# Altium PCB syspcb.PcbDoc
Units mm, origin at the board's own origin, x right, y up, seen from the top; angles counter-clockwise.
Board outline 95.88 x 90.17 mm, 4 copper layers (TOP, GND, VCC, BOT), stack 0.778 mm thick; 51 components, 51 nets, 217 pads, 123 vias.
Unrouted connection lines stored in the file: 41.
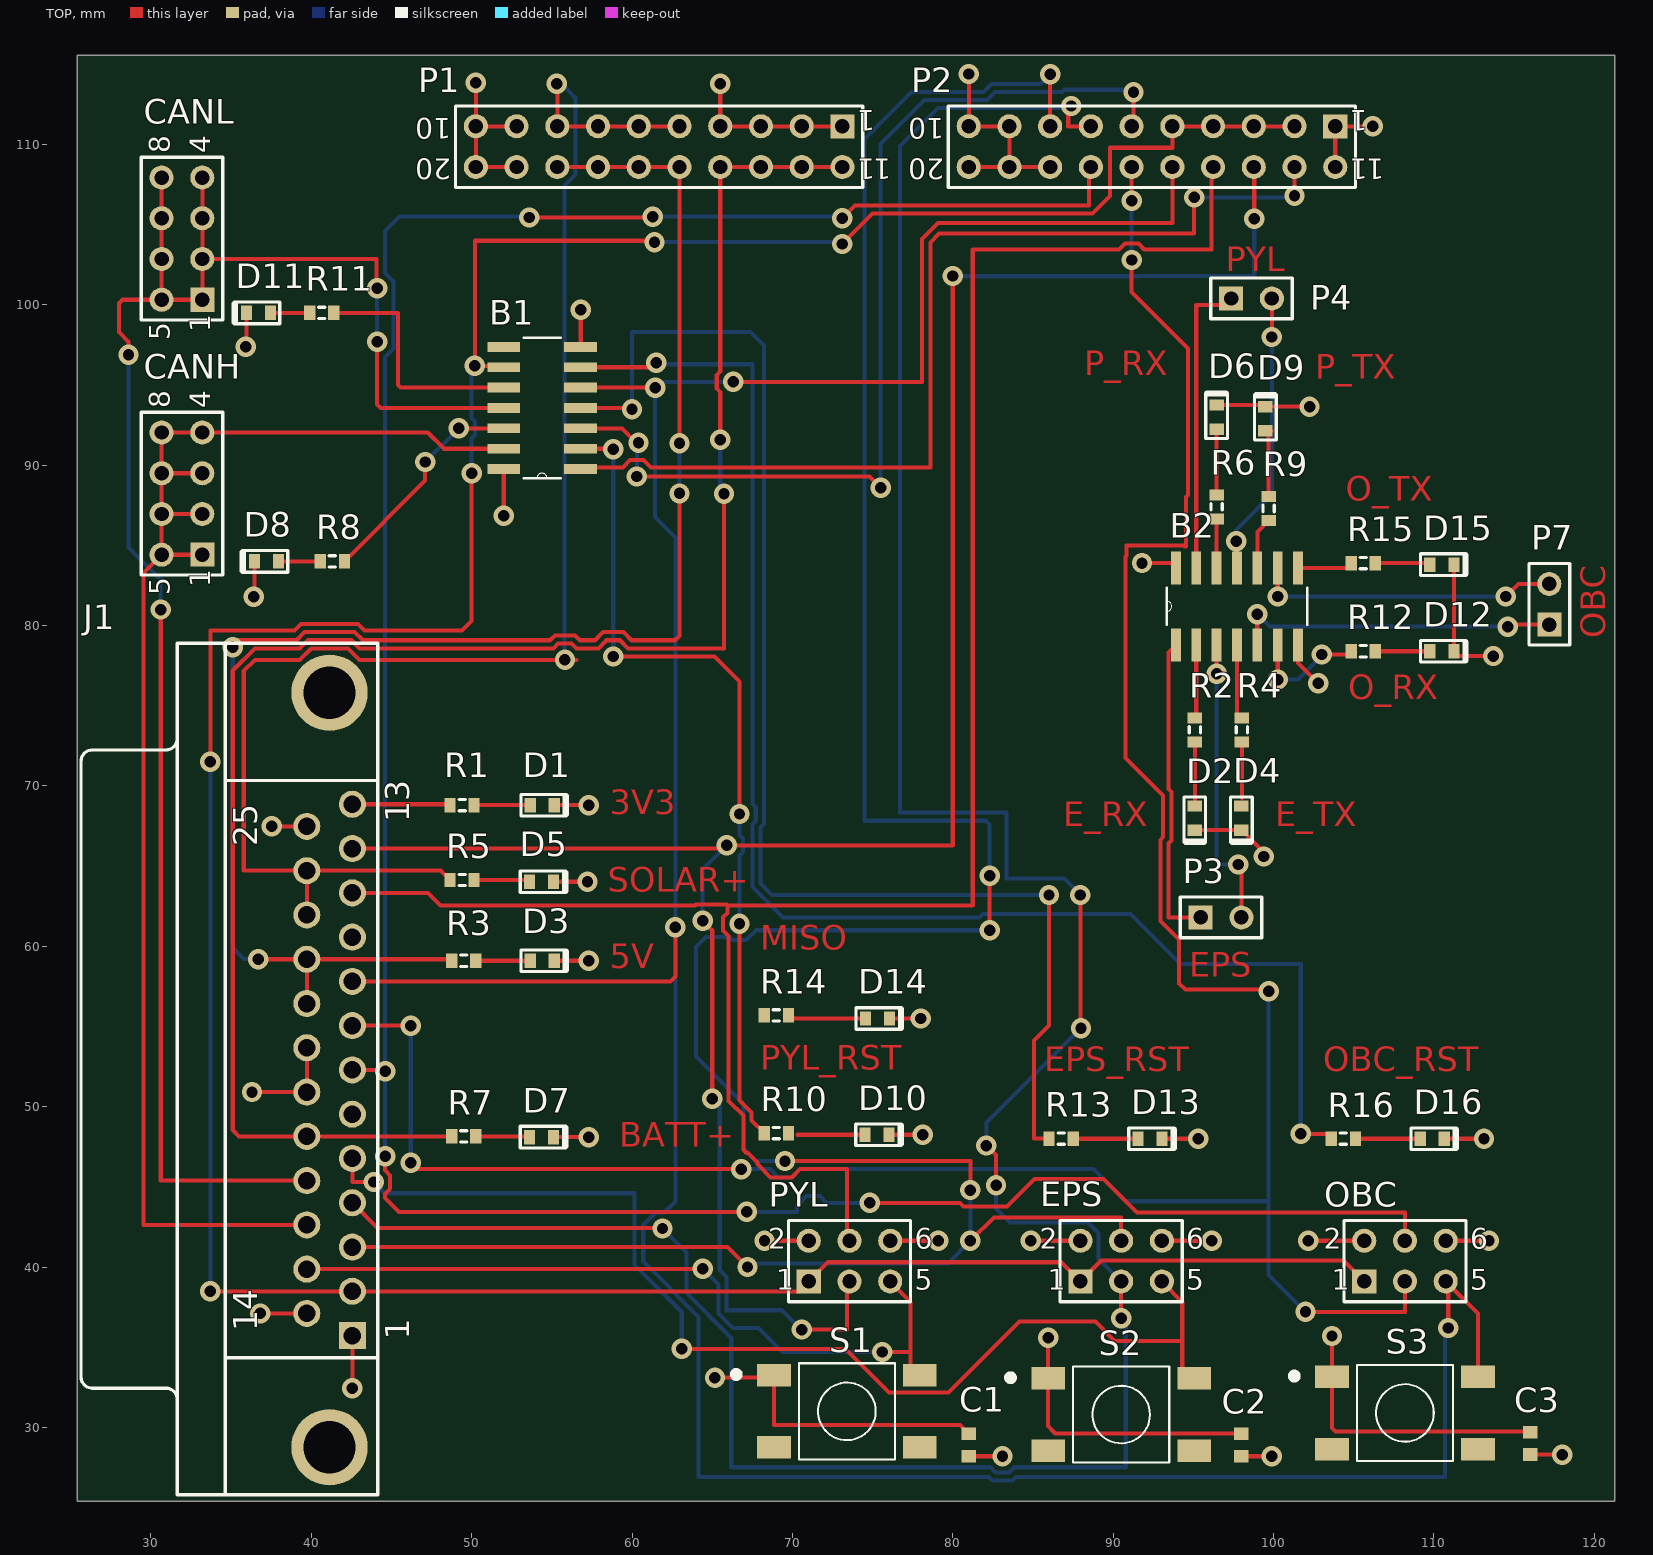
[diagram p0: TOP view]
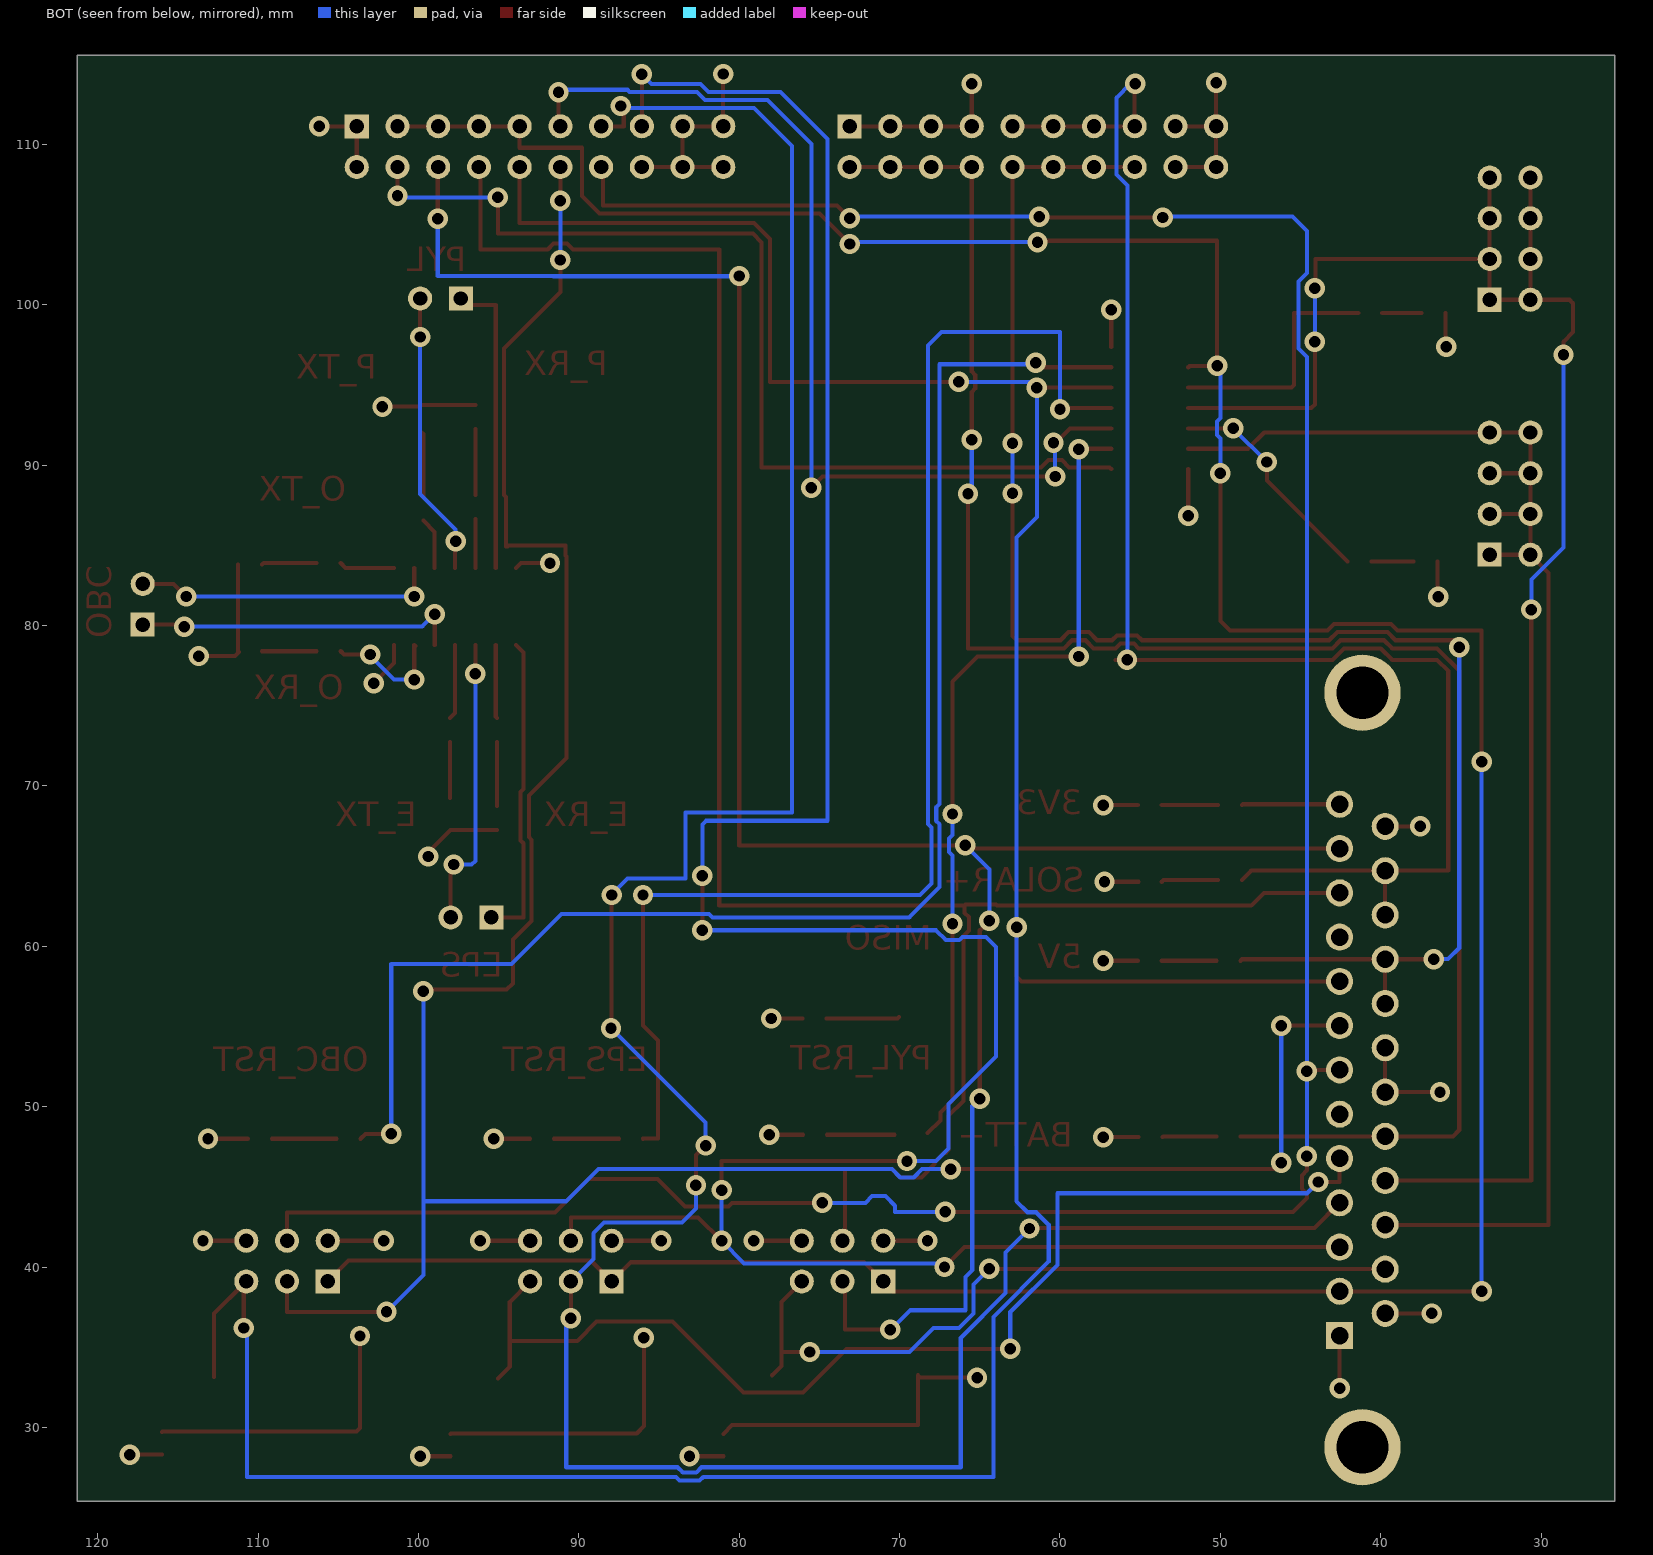
[diagram p1: BOT view, seen from below]
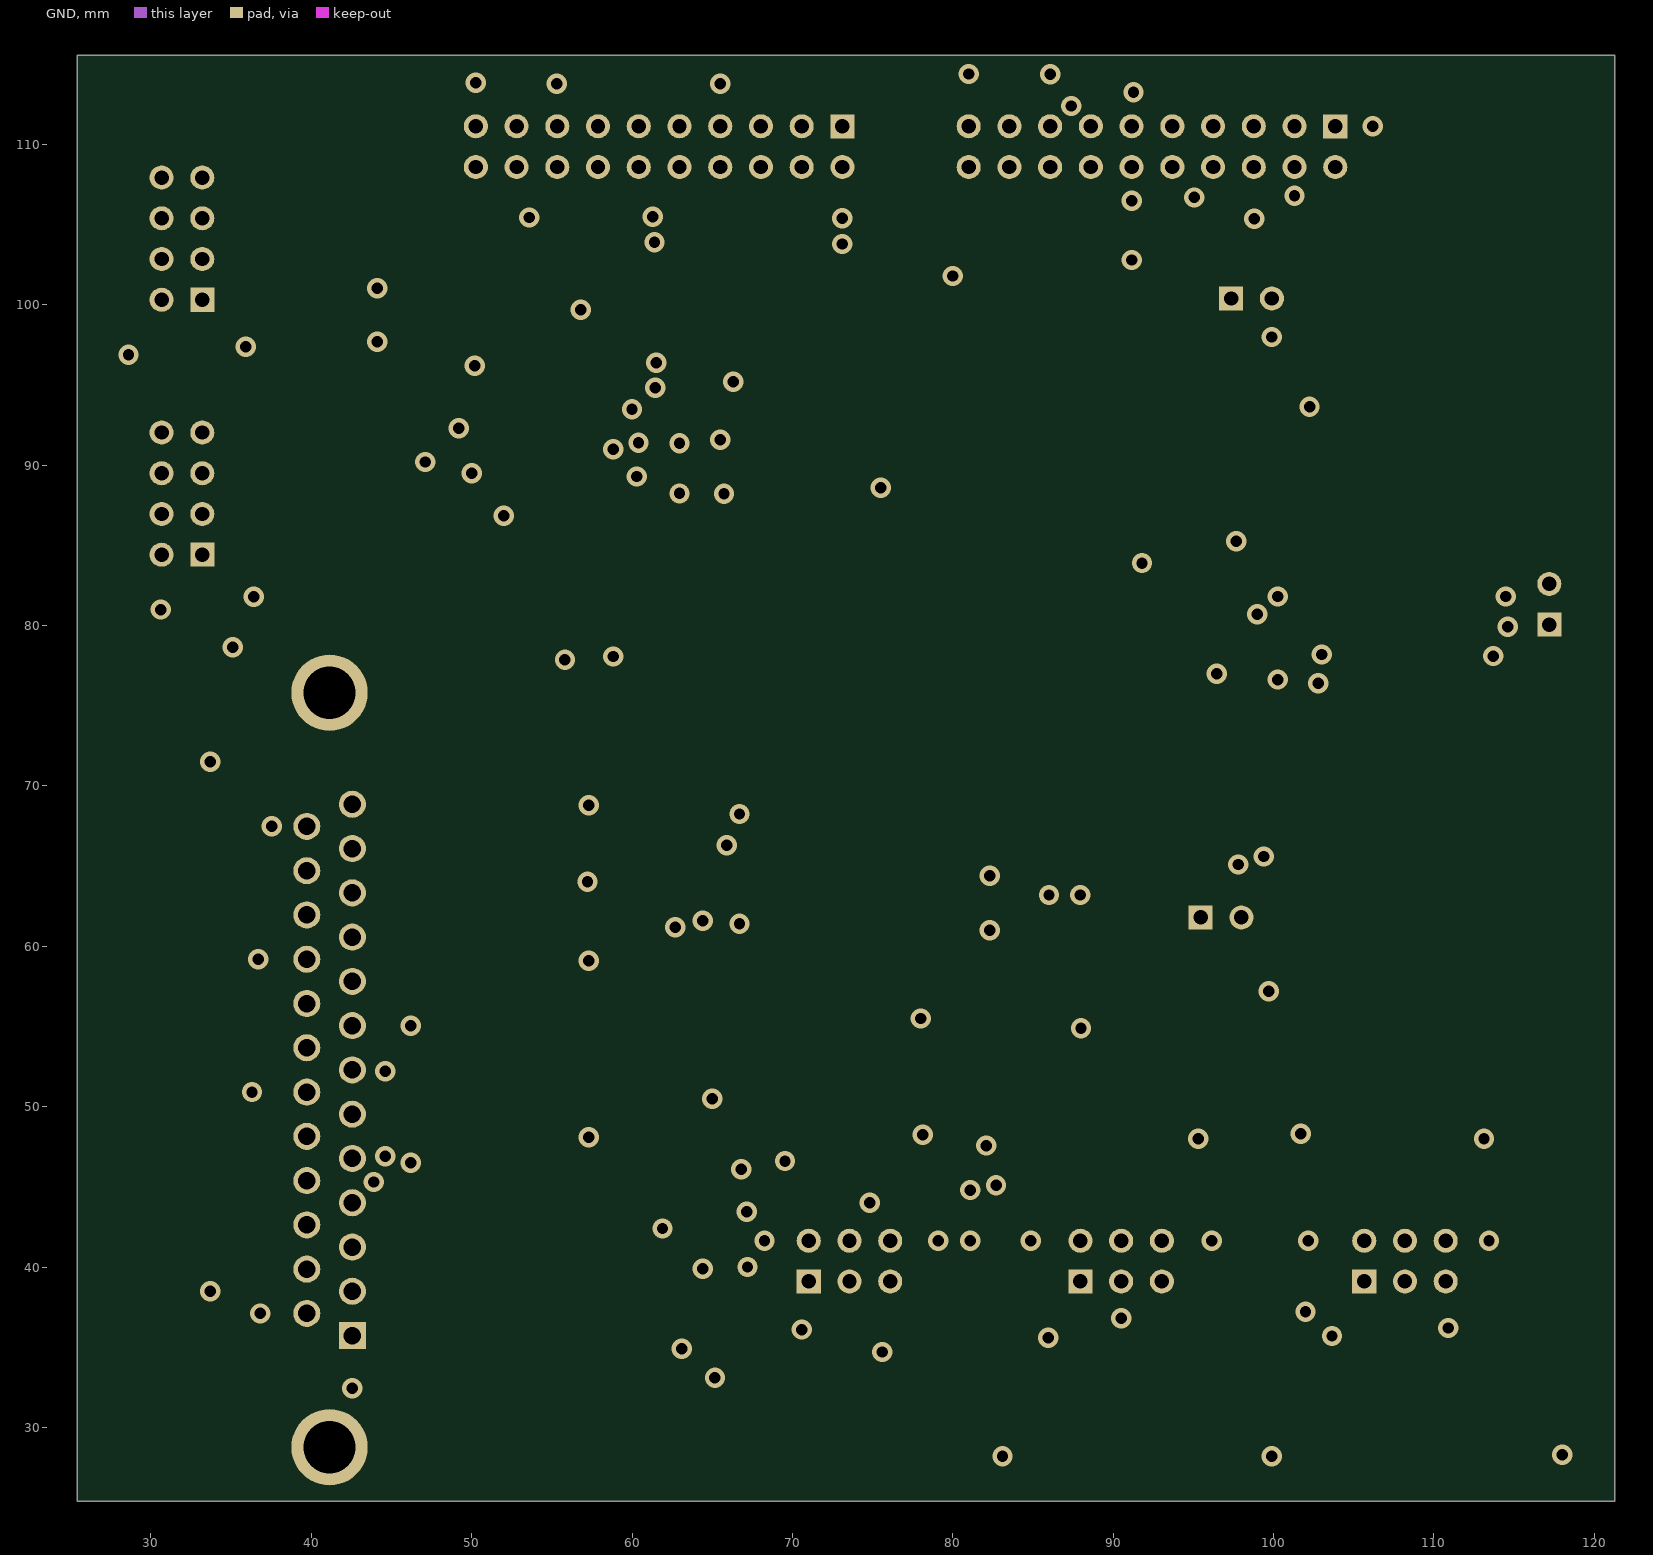
[diagram p2: GND]
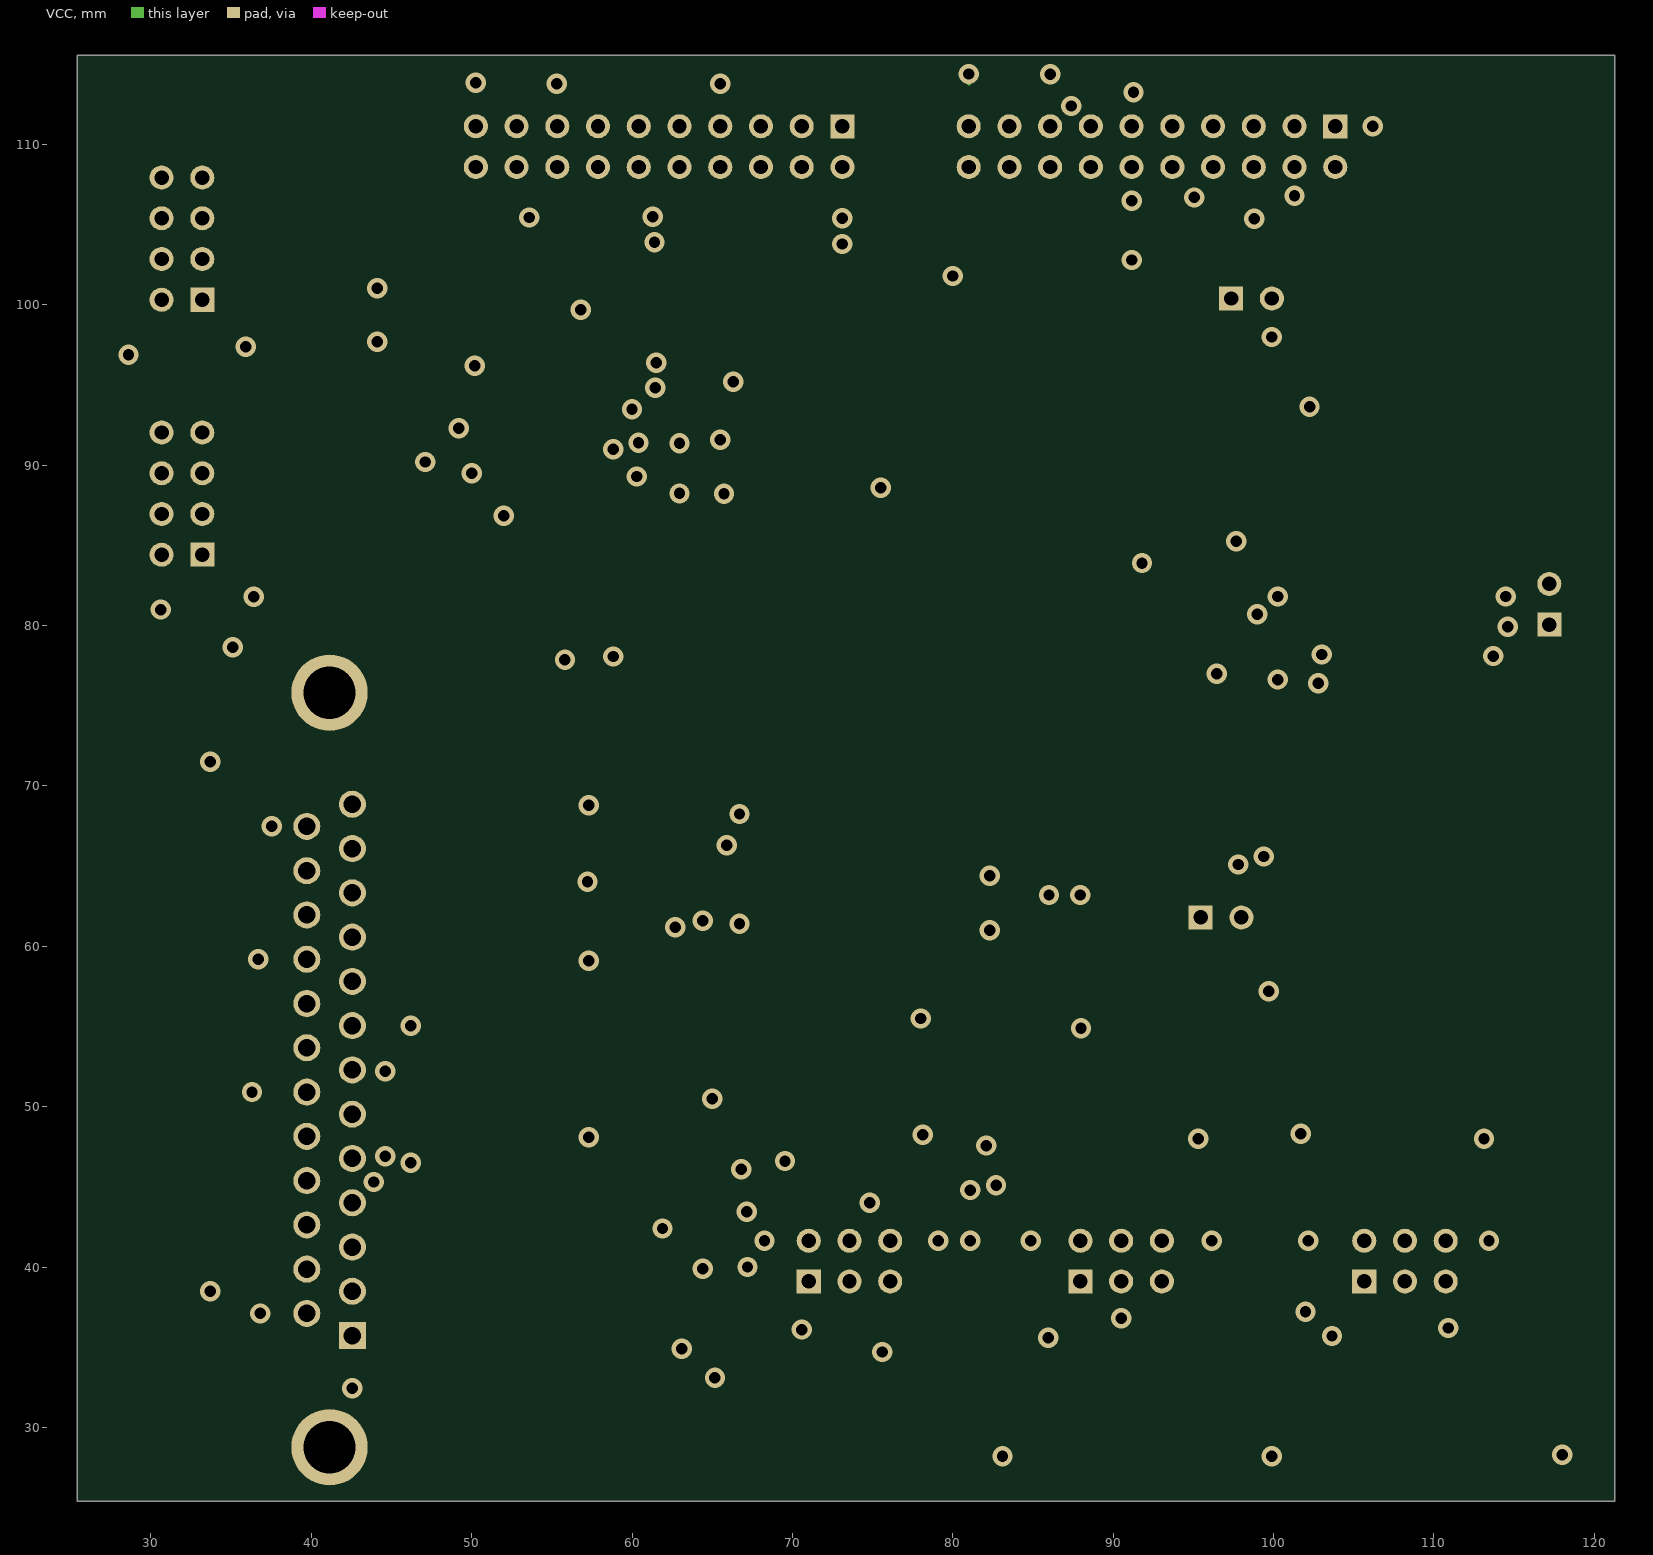
[diagram p3: VCC]

## Layer stack, top to bottom
Top Solder: solder mask 0.0102, Solder Resist, Dk 3.5
TOP: signal copper 0.0356
Dielectric 1: core 0.254, FR-4, Dk 4.2
GND: signal copper 0.036
Dielectric 3: prepreg 0.127, Dk 4.2
VCC: signal copper 0.036
Dielectric 2: core 0.254, Dk 4.2
BOT: signal copper 0.0356
Bottom Solder: solder mask 0.0102, Solder Resist, Dk 3.5

## Board outline
25.4,25.4 121.285,25.4 121.285,115.57 25.4,115.57

## Design rules (kind name [scope] priority, off if disabled: settings)
Clearance [All] p1: gap=0.254 ignorepadtopadclearanceinfootprint=FALSE except(0: Arc-Hole Track-Hole SMDPad-Hole THPad-Hole Via-Hole Fill-Hole Poly-Hole Region-Hole Text-Hole)
PolygonConnect [All] p1: connectstyle=Relief reliefconductorwidth=0.254 reliefentries=4 polygonreliefangle="90 Angle" airgapwidth=0.254
RoomDefinition syspcb [InComponentClass('syspcb')] p1: confinementstyle=ConfineIn formatcopy=TRUE lockcomponents=FALSE outline 0,0 50.8,0 50.8,25.4 0,25.4
RoutingVias [All] p1: holewidth=0.711 width=1.27 viastyle="Through Hole" minholewidth=0.711 minwidth=1.27 maxholewidth=0.711 maxwidth=1.27
SolderMaskExpansion [All] p1: expansion=0.102
Width [All] p1: maxlimit=0.254 minlimit=0.254 preferedwidth=0.254
30 further rules are at their usual default settings.

## Components (designator, comment, footprint, x,y, rotation, side; value= is the part's Value field where it differs from the comment)
B1 "SN74LV07A" SOIC127P600X175-14N 51.999,97.38 r180 top
B2 "SN74LV07A" SOIC127P600X175-14N 101.535,83.594 r90 top
C1 "Cap" 1608[0603] 80.993,28.9 r90 top value=1uF
C2 "Cap" 1608[0603] 98,28.9 r90 top value=1uF
C3 "Cap" 1608[0603] 116,29 r90 top value=1uF
CANH "Header 4X2A" HDR2X4_CEN 33.2,84.42 r90 top
CANL "Header 4X2A" HDR2X4_CEN 33.2,100.32 r90 top
D1 "LED2" 0603-LED 54.4,68.8 r0 top
D2 "LED2" 0603-LED 95.095,67.994 r270 top
D3 "LED2" 0603-LED 54.4,59.1 r0 top
D4 "LED2" 0603-LED 98,67.994 r270 top
D5 "LED2" 0603-LED 54.35,64.025 r0 top
D6 "LED2" 0603-LED 96.455,93 r90 top
D7 "LED2" 0603-LED 54.35,48.1 r0 top
D8 "LED2" 0603-LED 37.2,84 r180 top
D9 "LED2" 0603-LED 99.5,92.9 r90 top
D10 "LED2" 0603-LED 75.275,48.25 r0 top
D11 "LED2" 0603-LED 36.7,99.5 r180 top
D12 "LED2" 0603-LED 110.5,78.4 r0 top
D13 "LED2" 0603-LED 92.296,48 r0 top
D14 "LED2" 0603-LED 75.3,55.5 r0 top
D15 "LED2" 0603-LED 110.5,83.8 r0 top
D16 "LED2" 0603-LED 109.9,48 r0 top
EPS "HDR2X3" HDR2X3 87.96,39.1 r0 top
J1 "D Connector 25" DSUB1.385-2H25A 31.638,52.291 r90 top
OBC "HDR2X3" HDR2X3 105.66,39.1 r0 top
P1 "Header 10X2A" HDR2X10_CEN 73.119,111.137 r180 top
P2 "Header 10X2A" HDR2X10_CEN 103.853,111.137 r180 top
P3 "EPS1" HDR1X2 95.46,61.8 r0 top
P4 "PYL1" HDR1X2 97.36,100.4 r0 top
P7 "OBC1" HDR1X2 117.2,80.06 r90 top
PYL "HDR2X3" HDR2X3 71.02,39.1 r0 top
R1 "Res2" J1-0603 49.4,68.8 r0 top value=330
R2 "Res2" J1-0603 95.095,73.494 r270 top value=330
R3 "Res2" J1-0603 49.5,59.1 r0 top value=330
R4 "Res2" J1-0603 98.035,73.494 r270 top value=330
R5 "Res2" J1-0603 49.4,64.135 r0 top value=330
R6 "Res2" J1-0603 96.455,87.4 r90 top value=330
R7 "Res2" J1-0603 49.5,48.15 r0 top value=330
R8 "Res2" J1-0603 41.311,84 r180 top value=330
R9 "Res2" J1-0603 99.7,87.3 r90 top value=330
R10 "Res2" J1-0603 69,48.35 r0 top value=330
R11 "Res2" J1-0603 40.65,99.5 r180 top value=330
R12 "Res2" J1-0603 105.6,78.4 r0 top value=330
R13 "Res2" J1-0603 86.76,48 r0 top value=330
R14 "Res2" J1-0603 69,55.7 r0 top value=330
R15 "Res2" J1-0603 105.6,83.9 r0 top value=330
R16 "Res2" J1-0603 104.36,48 r0 top value=330
S1 "SW-PB" SW_5-1437565-0 73.4,31 r0 top
S2 "SW-PB" SW_5-1437565-0 90.5,30.8 r0 top
S3 "SW-PB" SW_5-1437565-0 108.2,30.9 r0 top

## Footprints (in the part's own frame and the unit in brackets; to place one, negate y for a bottom-side part, rotate by r counter-clockwise, add the part's x,y. Pads: shape width x height; smd on the part's side, far side on the other; paste and mask are expansions set on the pad)
0603-LED [mm]
  rect 0.7x0.9 smd: 1(-0.75,0) 2(0.75,0)
  silkscreen extent -1.32,-0.67 1.5,0.67, body extent -0.85,-0.48 0.85,0.48, height 0.9
1608[0603] [mm] "Chip Capacitor, Body 1.6x0.8mm, IPC High Density"
  rect 0.8x0.9 smd: 1(-0.7,0) 2(0.7,0)
  body extent -0.87,-0.48 0.87,0.48, height 1.3
DSUB1.385-2H25A [mm] "Connector; D Subminiature; 25 Position; Right Angle; Pitch 1.385 mm"
  rect 1.69x1.69 hole 1.09: 1(-16.566,-10.92)
  round 1.69 hole 1.09: 2(-13.805,-10.92) 3(-11.044,-10.92) 4(-8.283,-10.92) 5(-5.522,-10.92) 6(-2.761,-10.92) 7(0,-10.92) 8(2.761,-10.92) 9(5.522,-10.92) 10(8.283,-10.92) 11(11.044,-10.92) 12(13.805,-10.92) 13(16.566,-10.92) 14(-15.185,-8.08) 15(-12.424,-8.08) 16(-9.663,-8.08) 17(-6.902,-8.08) 18(-4.141,-8.08) 19(-1.38,-8.08) 20(1.381,-8.08) 21(4.142,-8.08) 22(6.903,-8.08) 23(9.664,-8.08) 24(12.425,-8.08) 25(15.186,-8.08)
  round 4.76 hole 3.26: 26(-23.526,-9.5) 27(23.526,-9.5)
  silkscreen extent -26.5,-12.5 26.6,6
HDR1X2 [mm] "Connector; Header; 2 Position"
  rect 1.5x1.5 hole 0.9: 1(0,0)
  round 1.5 hole 0.9: 2(2.54,0)
  silkscreen extent -1.27,-1.27 3.81,1.27
HDR2X3 [mm] "Connector; Header; 3x2 Position"
  rect 1.5x1.5 hole 0.9: 1(0,0)
  round 1.5 hole 0.9: 2(0,2.54) 3(2.54,0) 4(2.54,2.54) 5(5.08,0) 6(5.08,2.54)
  silkscreen extent -1.27,-1.27 6.35,3.81
HDR2X4_CEN [mm] "Connector; Header; 4x2 Position"
  rect 1.5x1.5 hole 0.9: 1(0,0)
  round 1.5 hole 0.9: 2(2.54,0) 3(5.08,0) 4(7.62,0) 5(0,2.54) 6(2.54,2.54) 7(5.08,2.54) 8(7.62,2.54)
  silkscreen extent -1.27,-1.27 8.89,3.81
HDR2X10_CEN [mm] "Connector; Header; 10x2 Position"
  rect 1.5x1.5 hole 0.9: 1(0,0)
  round 1.5 hole 0.9: 2(2.54,0) 3(5.08,0) 4(7.62,0) 5(10.16,0) 6(12.7,0) 7(15.24,0) 8(17.78,0) 9(20.32,0) 10(22.86,0) 11(0,2.54) 12(2.54,2.54) 13(5.08,2.54) 14(7.62,2.54) 15(10.16,2.54) 16(12.7,2.54) 17(15.24,2.54) 18(17.78,2.54) 19(20.32,2.54) 20(22.86,2.54)
  silkscreen extent -1.27,-1.27 24.13,3.81
J1-0603 [mm] "Chip Resistor, Body 1.6x0.8mm, IPC High Density"
  rect 0.7x0.9 smd: 1(-0.75,0) 2(0.75,0)
  silkscreen extent -0.2,-0.35 0.2,0.35, body extent -0.85,-0.48 0.85,0.48, height 0.9
SOIC127P600X175-14N [mil]
  rect 81x24 smd: 1(-189,300) 2(-189,250) 3(-189,200) 4(-189,150) 5(-189,100) 6(-189,50) 7(-189,0) 8(0,0) 9(0,50) 10(0,100) 11(0,150) 12(0,200) 13(0,250) 14(0,300)
  silkscreen extent -140,-22 -49,322
SW_5-1437565-0 [mm]
  rect 2.1x1.4 smd: 1(-4.55,2.25) 2(4.55,2.25) 3(-4.55,-2.25) 4(4.55,-2.25)
  silkscreen extent -7.1,-3 3,3

## Part data
C1 C2 C3: "Capacitor", LatestRevisionDate=17-Jul-2002, LatestRevisionNote="Re-released for DXP Platform.", PackageDescription="Radial Cap, Thru-Hole; 2 Leads; 0.3 in Pin Spacing", PackageReference=RAD-0.3, Published=8-Jun-2000, Publisher="Altium Limited"
CANH CANL: "Header, 4-Pin, Dual row", LatestRevisionDate=17-Jul-2002, LatestRevisionNote="Re-released for DXP Platform.", Publisher="Altium Limited"
D1 D2 D3 D4 D5 D6 D7 D8 D9 D10 D11 D12 D13 D14 D15 D16: "Typical RED, GREEN, YELLOW, AMBER GaAs LED", LatestRevisionDate=17-Jul-2002, LatestRevisionNote="Re-released for DXP Platform.", PackageDescription="SM LED; 2 Flat Leads", PackageReference=3.2X1.6X1.1, PackageVersion=Feb-2002, Published=8-Jun-2000, Publisher="Altium Limited"
EPS OBC PYL: library part MHDR2X3, "Header, 3-Pin, Dual row", LatestRevisionDate=17-Jul-2002, LatestRevisionNote="Re-released for DXP Platform.", Publisher="Altium Limited"
J1: "Receptacle Assembly, 25 Position, Right Angle", PackageDocument=U, DatasheetDocument=19-Mar-1999, Gender=Receptacle, LatestRevisionDate=17-Jul-2002, LatestRevisionNote="Re-released for DXP Platform.", Orientation="Right Angle", PackageReference=787202, Positions=25, Published=15-Jun-2001, Publisher="Altium Limited"
P1 P2: "Header, 10-Pin, Dual row", LatestRevisionDate=17-Jul-2002, LatestRevisionNote="Re-released for DXP Platform.", Publisher="Altium Limited"
P3 P4 P7: library part "Header 2", "Header, 2-Pin", LatestRevisionDate=17-Jul-2002, LatestRevisionNote="Re-released for DXP Platform.", Publisher="Altium Limited"
R1 R2 R3 R4 R5 R6 R7 R8 R9 R10 R11 R12 R13 R14 R15 R16: "Resistor", LatestRevisionDate=17-Jul-2002, LatestRevisionNote="Re-released for DXP Platform.", PackageDescription="Axial Device, Thru-Hole; 2 Leads; 0.4 in Pin Spacing", PackageReference=AXIAL-0.4, Published=8-Jun-2000, Publisher="Altium Limited"
S1 S2 S3: "Switch", LatestRevisionDate=17-Jul-2002, LatestRevisionNote="Re-released for DXP Platform.", PackageDescription="Switch; 2 Leads", PackageReference=SPST-2, Published=24-Mar-1999, Publisher="Altium Limited"

## Via types
v1: diameter 1.27, hole 0.711, TOP to BOT, 123 vias

## Nets (pads, with @x,y where several pads share a name; then routed paths per layer and width w, separated by ;. In a path a pad name is that pad's centre, name@x,y a point inside that pad or via, vN(x,y) a via of type N, cw(c..) or ccw(c..) an arc to the next point about the centre after c; other vN are vias at no path point)
3V3: B1.14 B2.14 C1.2 C2.2 C3.2 EPS.2 J1.13 J1.14 OBC.2 P1.1 P1.2 P1.3 P1.4 P2.9 P2.10 P2.18 P2.19 P2.20 PYL.2 R1.1 S1.1 S2.1 S3.1 | length 103.6
  TOP w0.254: v1(36.806,37.106) J1.14 ; J1.13 48.593,68.857 R1.1 ; v1(51.999,86.851) B1.14 ; v1(65.17,33.1) 68.7,33.1 S1.1 68.85,30.15 80.443,30.15 C1.2 ; v1(65.499,113.793) P1.4 P1.3 P1.2 P1.1 ; v1(68.26,41.64) PYL.2 ; P2.20 P2.19 ; v1(81,114.4) 81,111.144 P2.10 P2.9 P2.19 ; v1(84.86,41.64) EPS.2 ; v1(85.95,35.6) S2.1 85.95,30.073 86.392,29.631 97.969,29.631 C2.2 ; P2.18 P2.19 ; v1(91.8,83.9) 93.609,83.9 B2.14 ; v1(102.16,41.64) OBC.2 ; v1(103.65,35.7) S3.1 103.65,29.95 103.869,29.731 115.969,29.731 C3.2
  VCC w0.254: v1@36.8,37.1 v1(36.806,37.106) ; v1(51.999,86.851) v1@52.3,86.55 ; v1@81,113.8 v1(81,114.4) ; v1@84.8,41.7 v1(84.86,41.64) ; v1@102.1,41.7 v1(102.16,41.64)
5V: J1.21 J1.22 P1.15 P1.16 P1.17 P1.18 R3.1 | length 102.1
  TOP w0.254: v1(35.1,78.639) 34.844,78.895 35.035,79.086 39.066,79.086 39.574,79.594 42.702,79.594 43.21,79.086 54.887,79.086 55.184,79.384 56.447,79.384 56.744,79.086 57.69,79.086 58.198,79.594 59.461,79.594 59.969,79.086 62.686,79.086 62.959,79.359 v1(62.959,88.241) ; v1(36.7,59.194) J1.22 ; J1.21 J1.22 ; R3.1 48.656,59.194 J1.22 ; P1.18 P1.17 P1.16 P1.15 v1(62.959,91.367)
  BOT w0.254: v1(35.1,78.639) 35.1,59.9 35.8,59.2 36.694,59.2 v1(36.7,59.194) ; v1(62.959,88.241) v1(62.959,91.367)
B_CANH: B1.12 R8.1 | length 14.1
  TOP w0.254: R8.1 47.1,89.039 v1(47.1,90.2) ; v1(49.2,92.3) B1.12
  BOT w0.254: v1(47.1,90.2) v1(49.2,92.3)
B_CANL: B1.10 R11.1 | length 15.2
  TOP w0.254: R11.1 45.4,99.5 45.4,95 45.56,94.84 B1.10
B_E_RST: B1.4 R13.1 | length 85.1
  TOP w0.254: B1.4 59.93,93.57 v1(60,93.5) ; v1(86,63.2) 86,55.07 85.065,54.135 85.065,48.01 86,48.01 R13.1
  BOT w0.254: v1(60,93.5) 60,98.3 67.4,98.3 68.224,97.476 68.224,67.619 68.008,67.403 68.008,63.91 68.718,63.2 v1(86,63.2)
B_MISO: B1.8 R14.1
B_O_RST: B1.6 R16.1 | length 92.7
  TOP w0.254: B1.6 61.39,96.11 61.5,96.22 v1(61.5,96.4) ; v1(101.7,48.3) 103.31,48.3 R16.1
  BOT w0.254: v1(61.5,96.4) 61.6,96.3 67.5,96.3 67.5,68.887 67.716,68.671 67.716,67.829 67.5,67.613 67.5,63.7 69.4,61.8 81.663,61.8 81.879,62.016 91.084,62.016 94.2,58.9 101.7,58.9 v1(101.7,48.3)
B_P_RST: B1.2 R10.1 | length 52.5
  TOP w0.254: B1.2 58.8,91.03 v1(58.83,91) ; v1(58.83,78.07) 65.13,78.07 66.7,76.5 v1(66.7,68.25) ; v1(66.7,61.4) 66.7,50.398 67.453,49.646 67.453,49.147 R10.1
  BOT w0.254: v1(58.83,78.07) v1(58.83,91) ; v1(66.7,61.4) 66.7,65.663 66.916,65.879 66.916,66.721 66.7,66.937 v1(66.7,68.25)
B_RX1: B2.2 R2.1 | length 4.6
  TOP w0.254: R2.1 95.185,74.334 B2.2
B_RX2: B2.12 R6.1 | length 3.1
  TOP w0.254: B2.12 R6.1
B_RX3: B2.6 R12.1 | length 7.6
  TOP w0.254: B2.6@100.2,78.729 B2.6 v1(100.265,76.635) ; v1(103,78.2) 104.65,78.2 R12.1
  BOT w0.254: v1(100.265,76.635) 101.535,76.635 103,78.1 v1(103,78.2)
B_TX1: B2.4 R4.1 | length 4.7
  TOP w0.254: B2.4 97.725,74.554 R4.1
B_TX2: B2.10 R9.1 | length 3.2
  TOP w0.254: B2.10 98.995,85.845 R9.1
B_TX3: B2.8 R15.1 | length 3.4
  TOP w0.254: B2.8 104.544,83.594 R15.1
BATT+: J1.18 P1.11 P1.12 P1.13 P1.14 R7.1 | length 112.7
  TOP w0.254: R7.1 J1.18 35.5,48.15 35.1,48.55 35.1,77.202 36.476,78.578 39.276,78.578 39.784,79.086 42.492,79.086 43,78.578 55.097,78.578 55.395,78.876 56.236,78.876 56.534,78.578 57.901,78.578 58.409,79.086 59.25,79.086 59.758,78.578 65.733,78.578 v1(65.733,88.233) ; v1(65.499,91.601) 65.499,94.564 65.284,94.779 65.284,95.621 65.499,95.836 P1.14 P1.13 P1.12 P1.11
  BOT w0.254: v1(65.499,91.601) 65.499,88.467 v1(65.733,88.233)
CANH: B1.13 CANH.1 CANH.2 CANH.3 CANH.4 CANH.5 CANH.6 CANH.7 CANH.8 J1.16 | length 89.4
  TOP w0.254: CANH.1 CANH.5 ; CANH.2 CANH.6 ; CANH.3 CANH.7 ; J1.16 29.528,42.628 29.528,83.288 CANH.5 ; B1.13 48.27,91.03 47.26,92.04 CANH.4 CANH.8 CANH.7 ; CANH.5 CANH.6 ; CANH.6 CANH.7
CANL: B1.11 CANL.1 CANL.2 CANL.3 CANL.4 CANL.5 CANL.6 CANL.7 CANL.8 J1.17 | length 113.4
  TOP w0.254: v1(28.6,96.9) 28.6,97.7 28,98.3 28,100.1 28.22,100.32 CANL.5 ; v1(30.6,81) 30.611,80.989 30.611,45.389 J1.17 ; CANL.8 CANL.7 CANL.6 CANL.5 ; CANL.4 CANL.3 CANL.2 ; v1(44.1,97.7) 44.1,93.8 44.33,93.57 B1.11 ; v1(44.1,101.041) 44.06,101.081 44.06,102.86 CANL.2 ; CANL.5 CANL.1 CANL.2
  BOT w0.254: v1(28.6,96.9) 28.6,84.881 30.6,82.881 v1(30.6,81) ; v1(44.1,97.7) v1(44.1,101.041)
E_MOSI: EPS.4 J1.3 P2.8 | length 176.9
  TOP w0.254: J1.3 65.953,41.247 v1(67.2,40) ; v1(69.539,46.608) 81.1,46.608 v1(81.1,44.8) ; v1(81.1,41.64) 82.56,43.1 90.5,43.1 EPS.4 ; v1(82.3,61) v1(82.3,64.4) ; P2.8 v1(86.073,114.373)
  BOT w0.254: v1(67.2,40) 67.431,40.231 79.691,40.231 v1(81.1,41.64) v1(81.1,44.8) ; v1(69.539,46.608) 67.729,46.608 66.945,47.392 66.945,50.164 63.984,53.125 63.984,59.959 64.609,60.584 66.079,60.584 66.279,60.384 67.121,60.384 67.737,61 v1(82.3,61) ; v1(82.3,64.4) 82.3,67.6 82.071,67.829 74.484,67.829 74.484,110.343 77.426,113.285 81.922,113.285 82.415,113.779 85.479,113.779 v1(86.073,114.373)
E_RST: B1.3 EPS.5 J1.5 P2.6 S2.2 | length 134.2
  TOP w0.254: J1.5 42.558,45.3 v1(43.9,45.3) ; B1.3 59.367,92.3 60.267,91.4 v1(60.4,91.4) ; v1(60.3,89.3) 74.8,89.3 v1(75.5,88.6) ; v1(63.1,34.9) 73.3,34.9 76.031,32.169 79.727,32.169 84.174,36.616 86.371,36.616 86.387,36.6 88.9,36.6 90.1,35.4 94.31,35.4 ; P2.6 91.271,111.255 v1(91.271,113.271) ; EPS.5 94.31,37.83 94.31,35.4 ; S2.2 94.31,33.79 94.31,35.4
  BOT w0.254: v1(43.9,45.3) 44.6,44.6 60.163,44.6 60.163,40.123 63.1,37.186 v1(63.1,34.9) ; v1(60.3,89.3) v1@60.3,91.367 ; v1(75.5,88.6) 75.5,110.037 78.24,112.777 82.132,112.777 82.626,113.271 86.834,113.271 86.979,113.416 91.125,113.416 v1(91.271,113.271)
E_SCK: EPS.3 J1.4 P2.7 | length 178.1
  TOP w0.254: J1.4 44.139,42.428 61.872,42.428 v1(61.9,42.4) ; v1(82.1,47.575) 82.7,46.975 v1(82.7,45.1) ; v1(87.4,112.4) 87.204,112.204 87.204,111.137 P2.7 ; v1(87.96,63.2) 87.96,54.865 87.995,54.9 v1(88,54.9) ; v1(90.5,36.8) EPS.3
  BOT w0.254: v1(61.9,42.4) 63.384,40.916 63.384,38.385 66.186,35.583 66.186,27.514 82.349,27.514 82.679,27.184 83.521,27.184 83.851,27.514 90.786,27.514 90.786,36.514 v1(90.5,36.8) ; v1@82.1,47.57 v1(82.1,47.575) 82.1,49 v1(88,54.9) ; v1(82.7,45.1) 82.7,43.651 83.58,42.771 88.428,42.771 89.091,42.108 89.091,40.509 EPS.3 ; v1(87.4,112.4) 87.269,112.269 79.069,112.269 76.7,109.9 76.7,68.337 83.363,68.337 83.363,64.237 86.963,64.237 88,63.2 v1(87.96,63.2)
GND: B1.7 B2.7 C1.1 C2.1 C3.1 D1.2 D2.2 D3.2 D4.2 D5.2 D6.2 D7.2 D8.2 D9.2 D10.2 D11.2 D12.2 D13.2 D14.2 D15.2 D16.2 EPS.6 J1.1 J1.19 J1.20 J1.25 OBC.6 P1.9 P1.10 P1.19 P1.20 P2.1 P2.11 PYL.6 | length 86.5
  TOP w0.254: v1(35.9,97.4) 35.95,97.45 D11.2 ; v1(36.3,50.911) J1.19 J1.20 ; v1(36.4,81.8) 36.45,81.85 D8.2 ; v1(37.523,67.477) J1.25 ; v1(42.558,32.442) J1.1 ; P1.20 P1.10 ; v1(50.259,113.859) P1.10 ; P1.9 P1.10 ; D7.2 v1(57.3,48.1) ; D5.2 v1(57.225,64.025) ; D3.2 v1(57.3,59.1) ; D1.2 v1(57.3,68.8) ; B1.7 v1(56.8,99.7) ; D10.2 v1(78.125,48.25) ; D14.2 v1(78,55.5) ; PYL.6 v1(79.1,41.64) ; C1.1 v1(83.1,28.2) ; EPS.6 v1(96.14,41.64) ; D13.2 v1(95.3,48) ; D2.2 D4.2 99.4,65.844 v1(99.4,65.6) ; D6.2 99.8,93.75 99.9,93.65 v1(102.25,93.65) ; C2.1 v1(99.9,28.2) ; B2.7 101.535,77.665 v1(102.8,76.4) ; P2.11 P2.1 v1(106.2,111.137) ; D16.2 v1(113.13,48) ; OBC.6 v1(113.44,41.64) ; D15.2 D12.2 111.2,78.35 111.45,78.1 v1(113.7,78.1) ; C3.1 v1(118,28.3)
  GND w0.254: v1@37.5,67.5 v1(37.523,67.477) ; v1(42.558,32.442) v1@42.6,32.4 ; v1(50.259,113.859) v1@50.3,113.9 ; v1(57.225,64.025) v1@57.4,64.2 ; v1(57.3,68.8) v1@57.5,69 ; v1(78.125,48.25) v1@78.275,48.4 ; v1(96.14,41.64) v1@96.2,41.7 ; v1(102.25,93.65) v1@102.3,93.6 ; v1(113.13,48) v1@113.23,48.1 ; v1(113.44,41.64) v1@113.5,41.7
MISO: B1.9 EPS.1 J1.2 OBC.1 P2.2 P2.3 P2.4 P2.5 PYL.1 | length 215.1
  TOP w0.254: v1(33.7,38.5) 33.7,38.486 J1.2 70.406,38.486 PYL.1 72.22,40.3 86.76,40.3 EPS.1 89.26,40.4 104.36,40.4 OBC.1 ; v1(33.7,71.5) 33.7,79.692 38.953,79.692 39.363,80.102 42.913,80.102 43.323,79.692 49.392,79.692 50,80.3 v1(50,89.5) ; B1.9 51.909,96.2 v1(50.2,96.2) 50.2,104 61.3,104 v1(61.4,103.9) ; v1(73.1,103.8) 74.992,105.692 88.71,105.692 89.8,106.782 89.8,109.8 93.7,109.8 93.7,111.13 P2.5 P2.4 P2.3 P2.2
  BOT w0.254: v1(33.7,38.5) v1(33.7,71.5) ; v1(50,89.5) 50,91.663 50.216,91.879 50.216,92.721 50,92.937 50,96 v1(50.2,96.2) ; v1(61.4,103.9) 61.39,103.91 73.109,103.91 73.1,103.9 v1(73.1,103.8)
NetD1_1: D1.1 R1.2 | length 3.5
  TOP w0.254: R1.2 D1.1
NetD2_1: D2.1 R2.2 | length 4
  TOP w0.254: D2.1 R2.2
NetD3_1: D3.1 R3.2 | length 3.4
  TOP w0.254: R3.2 D3.1
NetD4_1: D4.1 R4.2 | length 3.5
  TOP w0.254: 98.035,69.259 R4.2
NetD5_1: D5.1 R5.2 | length 3.5
  TOP w0.254: R5.2 53.54,64.135 D5.1@53.65,64.025
NetD6_1: D6.1 R6.2 | length 4.1
  TOP w0.254: R6.2 D6.1
NetD7_1: D7.1 R7.2 | length 3.4
  TOP w0.254: R7.2 53.55,48.15 D7.1
NetD8_1: D8.1 R8.2 | length 2.6
  TOP w0.254: D8.1 R8.2
NetD9_1: D9.1 R9.2 | length 4.2
  TOP w0.254: R9.2 99.7,91.95 D9.1@99.9,92.15
NetD10_1: D10.1 R10.2 | length 4.2
  TOP w0.254: 70.325,48.25 D10.1
NetD11_1: D11.1 R11.2 | length 2.5
  TOP w0.254: D11.1 R11.2
NetD12_1: D12.1 R12.2 | length 3.4
  TOP w0.254: R12.2 D12.1
NetD13_1: D13.1 R13.2 | length 4
  TOP w0.254: R13.2 D13.1
NetD14_1: D14.1 R14.2 | length 4.6
  TOP w0.254: R14.2@70.025,55.6 70.125,55.5 D14.1
NetD15_1: D15.1 R15.2 | length 3.4
  TOP w0.254: R15.2 109.65,83.9 D15.1
NetD16_1: D16.1 R16.2 | length 6.6
  TOP w0.254: 50.259,108.597 52.799,108.597 ; R16.2 D16.1
O_MOSI: J1.7 OBC.4 P2.17 | length 178.8
  TOP w0.254: J1.7 44.509,52.291 v1(44.6,52.2) ; v1(44.6,46.9) 44.6,46.037 44.916,45.721 44.916,44.879 44.6,44.563 44.6,44.3 45.456,43.444 v1(67.156,43.444) ; v1(53.6,105.45) 61.25,105.45 v1(61.3,105.5) ; v1(73.1,105.4) 73.9,106.2 88.5,106.2 88.5,108.484 P2.17 ; v1@74.55,44 v1(74.825,44) 80.463,44 80.679,43.784 83.384,43.784 85.1,45.5 89.4,45.5 91.5,43.4 108.2,43.4 OBC.4
  BOT w0.254: v1(44.6,46.9) v1(44.6,52.2) 44.6,96.763 45.116,97.279 45.116,101.462 44.6,101.978 44.6,104.6 45.5,105.5 53.65,105.5 v1(53.6,105.45) ; v1(61.3,105.5) 73,105.5 v1(73.1,105.4) ; v1(67.156,43.444) 70.284,43.444 70.284,43.821 70.879,44.416 71.721,44.416 72.137,44 v1(74.825,44)
O_RST: B1.5 J1.9 OBC.5 P2.15 S3.2 | length 209.9
  TOP w0.254: J1.9 62.387,57.813 62.7,58.127 v1(62.7,61.2) ; B1.5 v1(61.44,94.84) ; v1(66.3,95.2) 66.308,95.192 78.092,95.192 78.092,104.11 79.082,105.1 93.693,105.1 P2.15 ; OBC.5 OBC.5@110.9,38.94 ; v1(110.9,36.2) OBC.5@110.9,38.94 ; S3.2 112.75,37.09 OBC.5@110.9,38.94
  BOT w0.254: v1(66.3,95.2) 61.8,95.2 v1(61.44,94.84) 61.44,86.76 62.7,85.5 v1(62.7,61.2) 62.7,44.1 62.016,43.416 61.479,43.416 60.7,42.637 60.7,40.351 64.154,36.897 64.154,26.9 82.245,26.9 82.469,26.676 83.731,26.676 83.955,26.9 110.7,26.9 110.7,36 v1(110.9,36.2)
O_SCK: J1.8 OBC.3 P2.16 | length 159.8
  TOP w0.254: J1.8 v1(46.2,55.052) ; v1(46.2,46.5) 46.2,46.321 46.421,46.1 v1(66.8,46.1) ; v1(91.153,102.8) 91.153,100.804 94.677,97.28 94.677,88.15 94.545,88.018 94.545,84.925 94.457,84.925 94.378,85.004 90.836,85.004 90.836,84.373 90.784,84.321 90.784,71.75 93.121,69.412 93.121,66.811 92.947,66.637 92.947,61.59 94.121,60.416 94.121,57.688 94.509,57.3 99.6,57.3 v1(99.7,57.2) ; v1(91.153,106.5) P2.16 ; v1(102,37.2) 108.2,37.2 OBC.3
  BOT w0.254: v1(46.2,46.5) v1(46.2,55.052) ; v1(66.8,46.1) 68.61,46.1 69.118,45.592 69.959,45.592 70.483,46.116 88.784,46.116 90.8,44.1 99.6,44.1 ; v1(91.153,102.8) v1(91.153,106.5) ; v1(99.7,57.2) 99.7,39.5 v1(102,37.2)
P_MOSI: J1.11 P2.14 PYL.4 | length 128.2
  TOP w0.254: J1.11 47.285,63.335 48.069,62.552 63.915,62.552 63.979,62.616 65.884,62.616 65.948,62.552 ; PYL.4 73.4,41.8 73.4,46.1 70.467,46.1 69.959,45.592 68.647,45.592 67.816,46.423 67.816,46.521 67.221,47.116 67.123,47.116 66.945,47.294 66.945,49.435 66.016,50.364 66.016,60.647 65.684,60.979 65.684,61.821 65.948,62.085 65.948,62.552 ; P2.14 96.14,108.504 96.14,103.448 91.942,103.448 91.574,103.816 90.732,103.816 90.364,103.448 81.248,103.448 81.248,62.552 65.948,62.552
P_RST: B1.1 J1.15 P2.12 PYL.5 S1.2 | length 110.8
  TOP w0.254: J1.15 64.367,39.867 v1(64.4,39.9) ; B1.1 56.9,89.86 59.423,89.86 59.879,90.316 60.721,90.316 61.177,89.86 78.6,89.86 78.6,103.9 79.15,104.45 95.05,104.45 v1(95.05,106.7) ; v1(75.6,34.7) 77.37,34.7 ; PYL.5 77.37,37.83 77.37,34.7 ; S1.2 77.37,33.83 77.37,34.7 ; v1(101.313,106.813) P2.12
  BOT w0.254: v1(64.4,39.9) 65.392,38.908 65.392,37.096 66.288,36.2 67.887,36.2 69.387,34.7 v1(75.6,34.7) ; v1(95.05,106.7) 101.2,106.7 v1(101.313,106.813)
P_SCK: J1.12 P2.13 PYL.3 | length 140.5
  TOP w0.254: J1.12 65.897,66.096 65.9,66.1 v1(65.9,66.3) 80,66.3 v1(80,101.8) ; v1(64.4,61.6) 65,61 v1(65,50.5) ; v1(70.579,36.1) 73.4,36.1 73.4,38.94 PYL.3 ; P2.13 98.8,108.57 v1(98.8,105.373)
  BOT w0.254: v1(64.4,61.6) 64.4,64.8 v1(65.9,66.3) ; v1@65,50.1 v1(65,50.5) 65.467,50.033 65.467,39.803 65.9,39.37 65.9,37.306 69.319,37.306 70.525,36.1 v1(70.579,36.1) ; v1(80,101.8) 80.016,101.784 91.574,101.784 91.59,101.8 98.8,101.8 v1(98.8,105.373)
RX1: B2.1 P3.1 | length 19.3
  TOP w0.254: B2.1 93.455,78.334 93.455,69.797 93.629,69.623 93.629,66.601 93.455,66.427 93.455,61.8 P3.1
RX2: B2.13 P4.1 | length 18.7
  TOP w0.254: B2.13 95.185,99.985 96.945,99.985 P4.1
RX3: B2.5 P7.1 | length 20.5
  TOP w0.254: v1(98.987,80.7) 98.987,78.802 B2.5 ; v1(114.6,79.931) 114.729,80.06 P7.1
  BOT w0.254: v1(98.987,80.7) 99,80.7 99.769,79.931 v1(114.6,79.931)
SOLAR+: J1.23 J1.24 P1.5 P1.6 P1.7 P1.8 R5.1 | length 97.1
  TOP w0.254: J1.23 J1.24 ; R5.1 48.069,64.716 J1.24 ; v1(55.3,113.793) 55.339,113.754 P1.8 P1.7 P1.6 P1.5 ; 56.54,77.86 v1(55.815,77.86) 43,77.86 42.282,78.578 39.994,78.578 39.276,77.86 36.476,77.86 35.784,77.168 35.784,64.716 J1.24
  BOT w0.254: v1(55.3,113.793) 55.592,113.793 56.47,112.915 56.47,108.129 55.784,107.443 55.784,77.892 v1(55.815,77.86)
TX1: B2.3 P3.2 | length 18.3
  TOP w0.254: v1(96.455,77) B2.3 ; v1(97.8,65.1) 98,64.9 P3.2
  BOT w0.254: v1(96.455,77) 96.455,65.33 96.685,65.1 v1(97.8,65.1)
TX2: B2.11 P4.2 | length 17.7
  TOP w0.254: v1(97.685,85.254) 97.725,85.214 B2.11 ; v1(99.9,98) P4.2
  BOT w0.254: v1(97.685,85.254) 97.685,85.985 99.9,88.2 v1(99.9,98)
TX3: B2.9 P7.2 | length 19
  TOP w0.254: v1(100.265,81.815) B2.9 ; v1(114.485,81.815) 115.27,82.6 P7.2
  BOT w0.254: v1(100.265,81.815) v1(114.485,81.815)
pads on no net: J1.6 J1.10 J1.26 J1.27 S1.3 S1.4 S2.3 S2.4 S3.3 S3.4

## Other copper
TOP:
  text "PYL" at 97.03,102.1 h1.52
  text "P_RX" at 88.2,95.6 h1.52
  text "P_TX" at 102.6,95.4 h1.52
  text "O_TX" at 104.5,87.775 h1.52
  text "OBC" at 120.7,79.2 h1.52 r90
  text "O_RX" at 104.65,75.4 h1.52
  text "3V3" at 58.6,68.225 h1.52
  text "E_RX" at 86.9,67.477 h1.52
  text "E_TX" at 100.1,67.477 h1.52
  text "SOLAR+" at 58.5,63.4 h1.52
  text "MISO" at 68,59.8 h1.52
  text "5V" at 58.6,58.625 h1.52
  text "EPS" at 94.756,58.1 h1.52
  text "PYL_RST" at 68,52.291 h1.52
  text "EPS_RST" at 85.7,52.2 h1.52
  text "OBC_RST" at 103.1,52.2 h1.52
  text "BATT+" at 59.2,47.5 h1.52

## Text inside footprints (layer, text, board x,y; h text height)
CANH: Top Overlay "5" at 31.168,81.88 h1.27 r90; Top Overlay "1" at 33.708,82.388 h1.27 r90; Top Overlay "4" at 33.708,93.564 h1.27 r90; Top Overlay "8" at 31.168,93.564 h1.27 r90
CANL: Top Overlay "5" at 31.168,97.78 h1.27 r90; Top Overlay "1" at 33.708,98.288 h1.27 r90; Top Overlay "4" at 33.708,109.464 h1.27 r90; Top Overlay "8" at 31.168,109.464 h1.27 r90
EPS: Top Overlay "6" at 94.564,41.132 h1.27; Top Overlay "5" at 94.564,38.592 h1.27; Top Overlay "2" at 85.42,41.132 h1.27; Top Overlay "1" at 85.928,38.592 h1.27
J1: Top Overlay "1" at 46.113,35.476 h1.5 r90; Top Overlay "13" at 46.113,67.733 h1.5 r90; Top Overlay "14" at 36.613,35.981 h1.5 r90; Top Overlay "25" at 36.613,66.227 h1.5 r90
OBC: Top Overlay "6" at 112.264,41.132 h1.27; Top Overlay "5" at 112.264,38.592 h1.27; Top Overlay "2" at 103.12,41.132 h1.27; Top Overlay "1" at 103.628,38.592 h1.27
P1: Top Overlay "20" at 48.735,109.105 h1.27 r180; Top Overlay "10" at 48.735,111.645 h1.27 r180; Top Overlay "1" at 75.151,109.105 h1.27 r180; Top Overlay "1" at 76.167,109.105 h1.27 r180; Top Overlay "1" at 75.151,112.153 h1.27 r180
P2: Top Overlay "20" at 79.469,109.105 h1.27 r180; Top Overlay "10" at 79.469,111.645 h1.27 r180; Top Overlay "1" at 105.885,109.105 h1.27 r180; Top Overlay "1" at 106.901,109.105 h1.27 r180; Top Overlay "1" at 105.885,112.153 h1.27 r180
PYL: Top Overlay "6" at 77.624,41.132 h1.27; Top Overlay "5" at 77.624,38.592 h1.27; Top Overlay "2" at 68.48,41.132 h1.27; Top Overlay "1" at 68.988,38.592 h1.27